# Altium PCB Buck converter.PcbDoc (part 1 of 2)
Units mm, origin at the board's own origin, x right, y up, seen from the top; angles counter-clockwise.
Board outline 40 x 50 mm, 2 copper layers (Top Layer, Bottom Layer); 24 components, 14 nets, 77 pads, 274 vias.
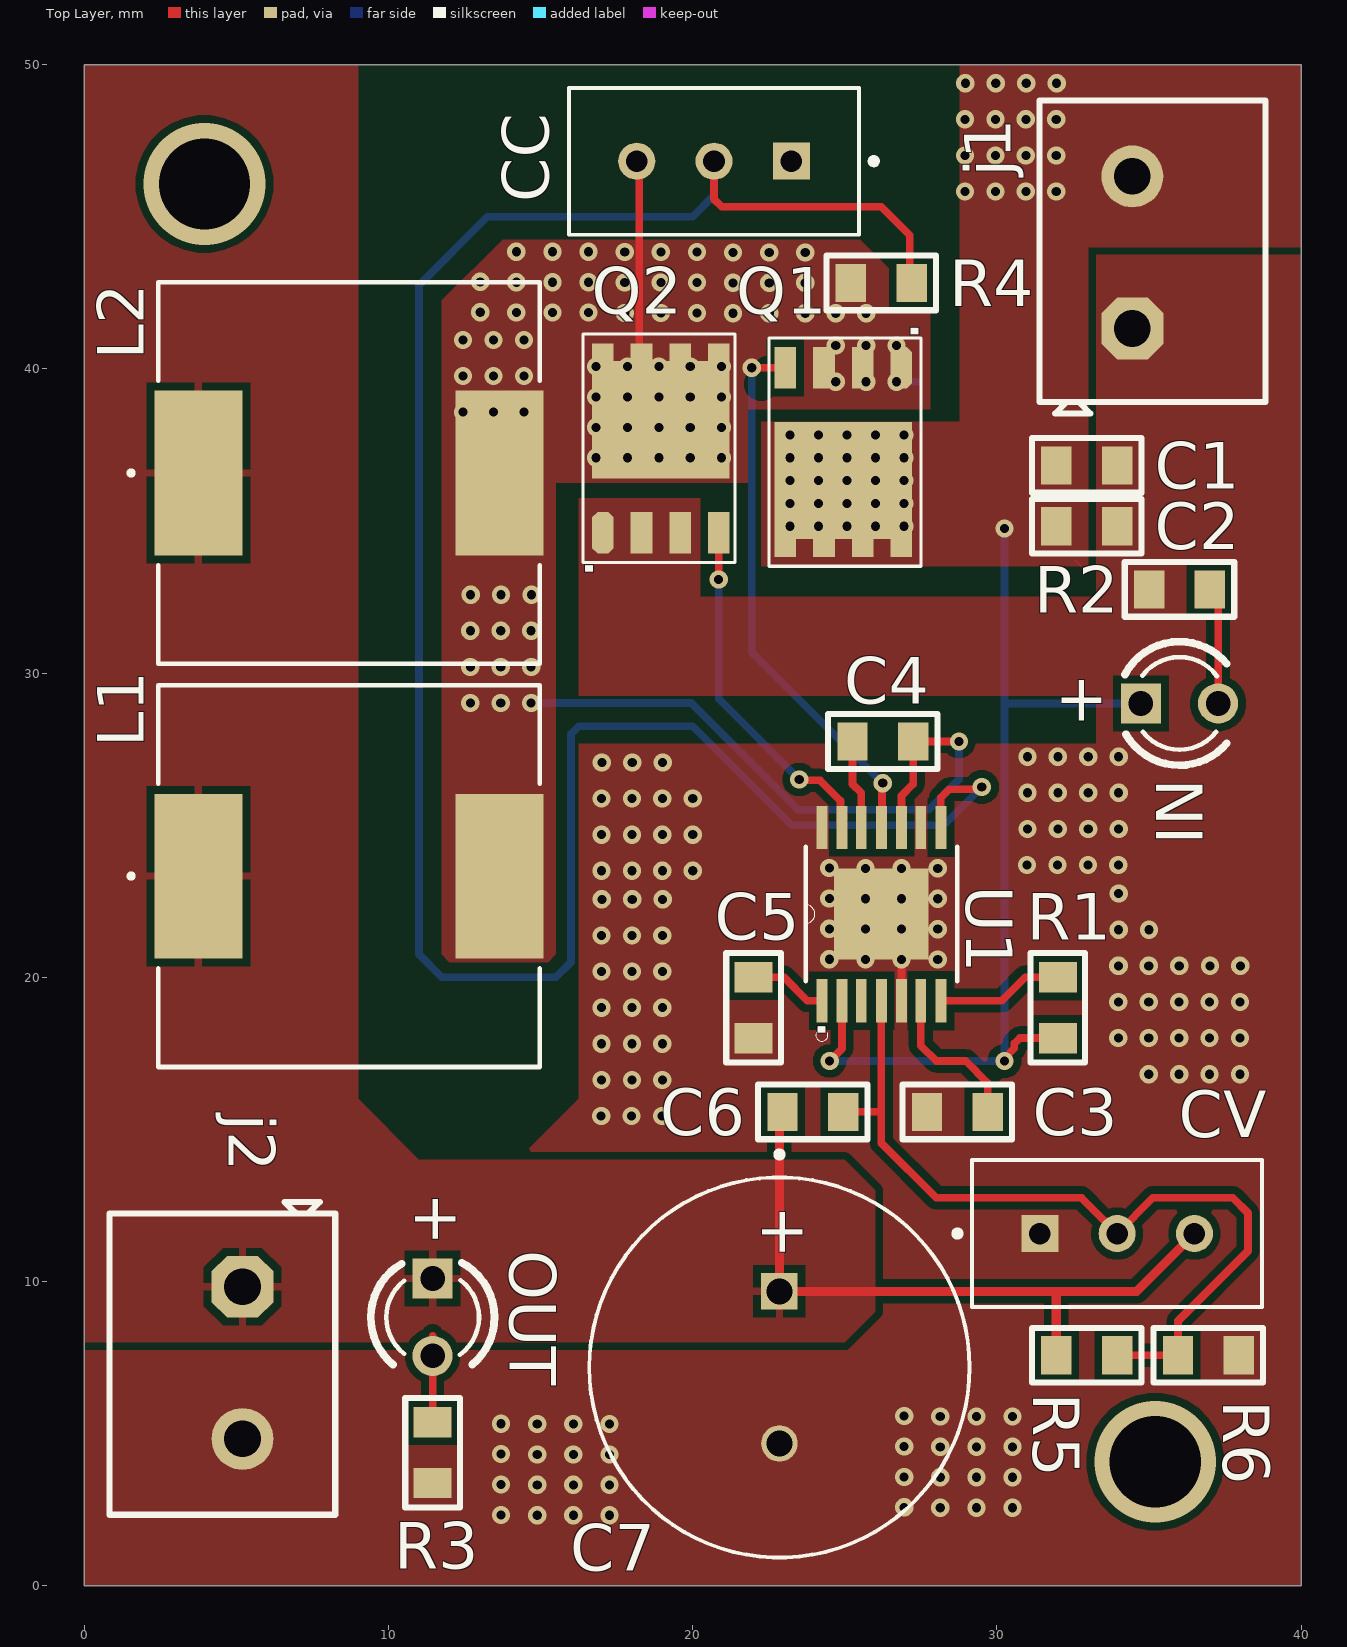
[diagram p0: Top Layer view]
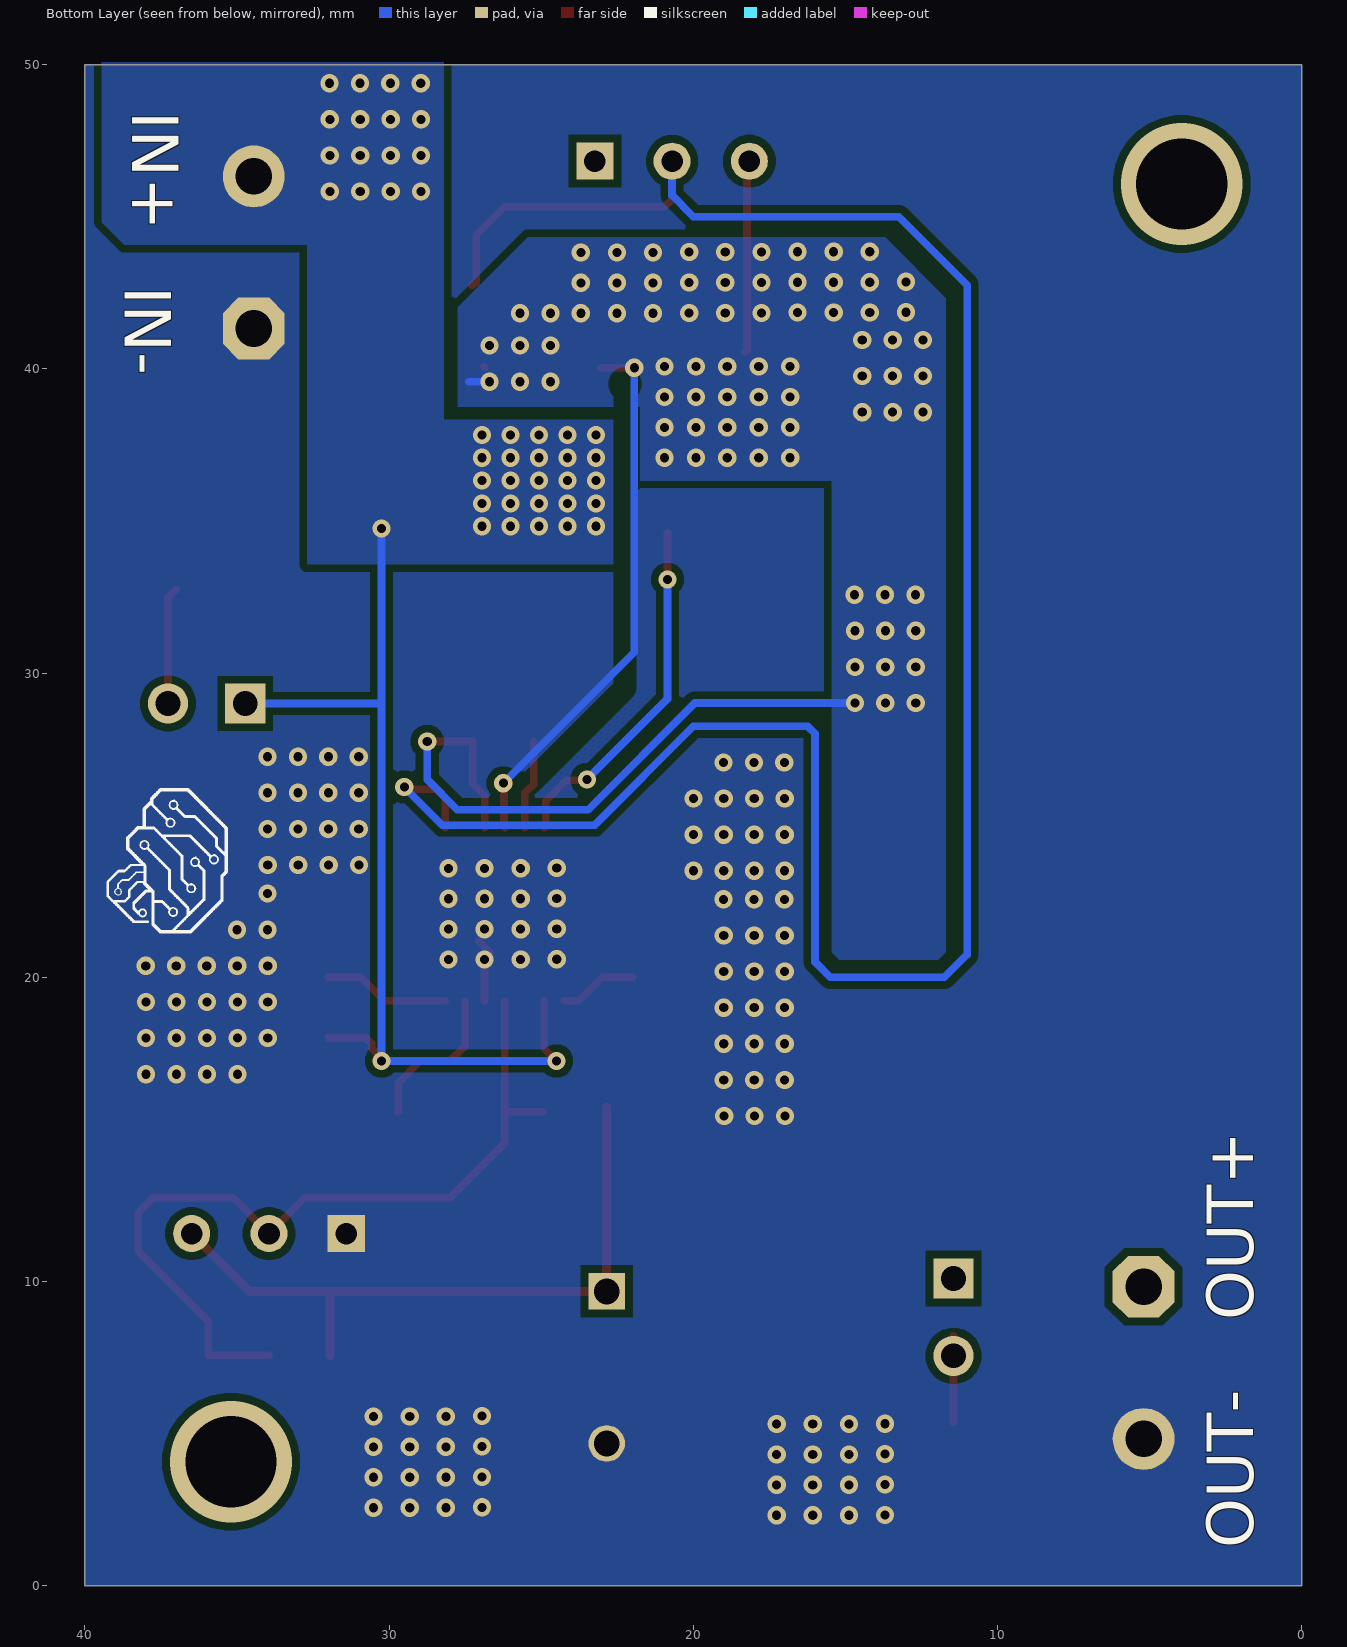
[diagram p1: Bottom Layer view, seen from below]
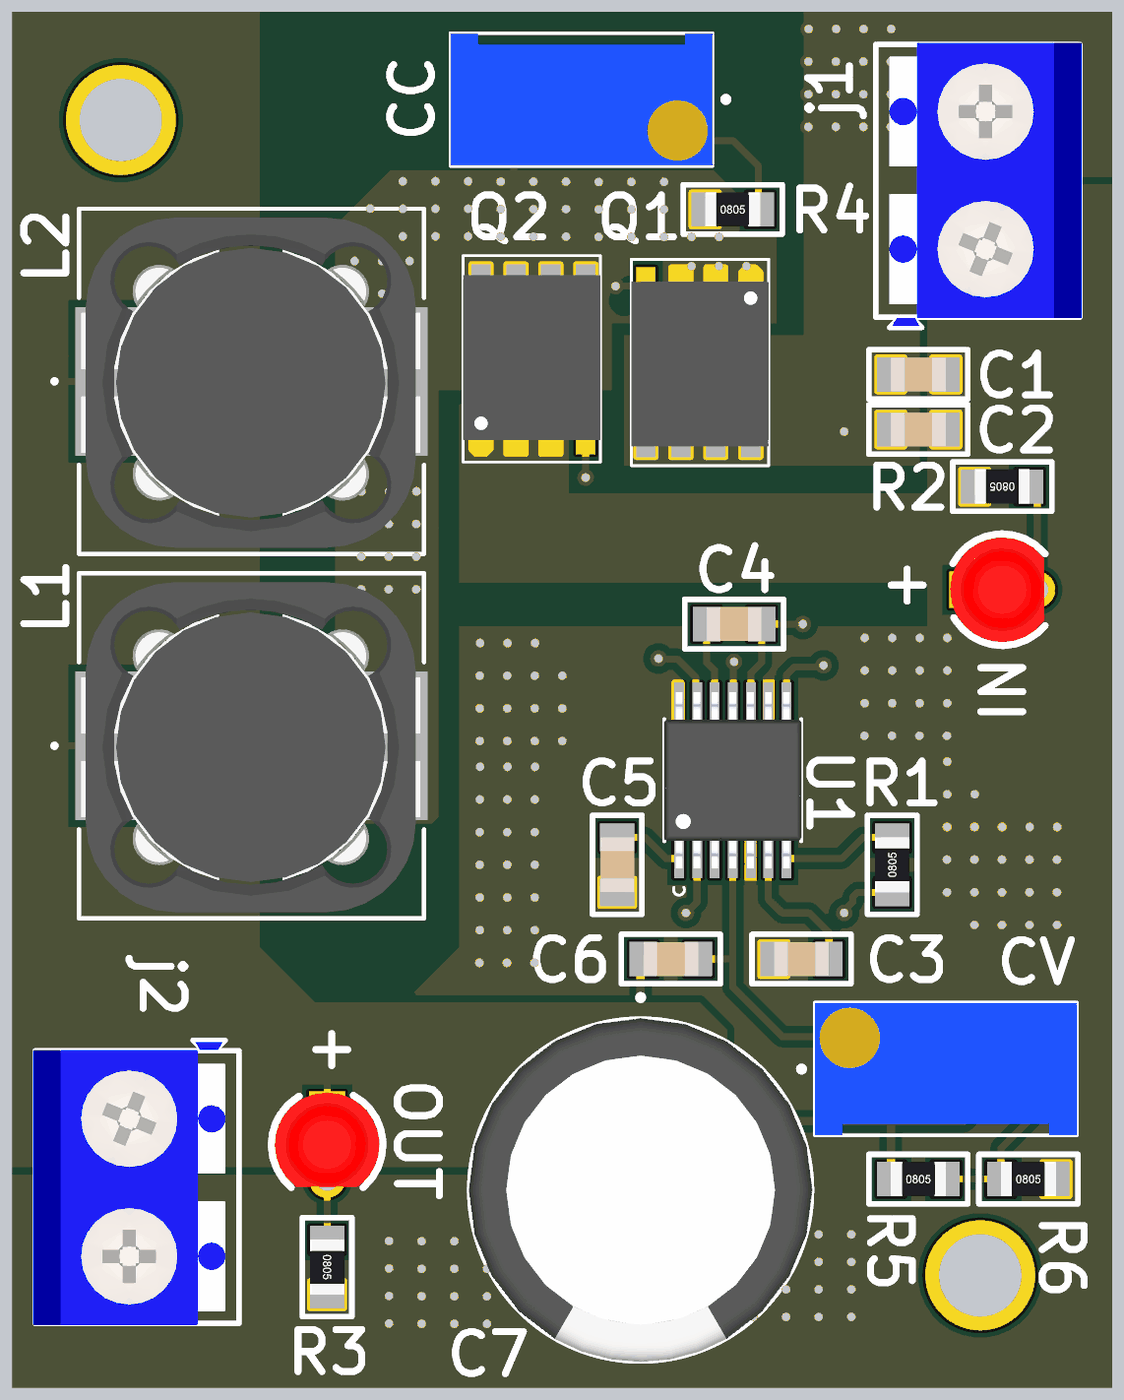
[diagram p2: 3D render of the assembled board from above, using the file's embedded part models]

## Layer stack, top to bottom
Top Solder: solder mask 0.0102, Solder Resist, Dk 3.5
Top Layer: signal copper 0.0356
Dielectric 1: dielectric 0.32, FR-4, Dk 4.8
Bottom Layer: signal copper 0.0356
Bottom Solder: solder mask 0.0102, Solder Resist, Dk 3.5

## Board outline
0,0 40,0 40,50 0,50

## Design rules (kind name [scope] priority, off if disabled: settings)
Clearance [All] p1: gap=0.254 ignorepadtopadclearanceinfootprint=FALSE
HoleSize [All] p1: absolutevalues=TRUE maxlimit=4 minlimit=0.254 maxpercent=80.000 minpercent=20.000
PolygonConnect thermalpad [(InNet('GND') OR InNet('NetC4_1') OR InNet('Vin'))] p1: connectstyle=Direct reliefconductorwidth=0.254 reliefentries=4 polygonreliefangle="90 Angle" airgapwidth=0.254
PolygonConnect [All] p2: connectstyle=Relief reliefconductorwidth=0.254 reliefentries=4 polygonreliefangle="90 Angle" airgapwidth=0.254
RoutingVias [All] p1: holewidth=0.6 width=1 viastyle="Through Hole" minholewidth=0.254 minwidth=0.5 maxholewidth=4 maxwidth=5
SolderMaskExpansion [All] p1: expansion=0.102 istentingtop=FALSE
UnRoutedNet [All] p1: checkbadconnections=TRUE
Width [All] p1: maxlimit=3 minlimit=0.254 preferedwidth=0.254 minimp=50.000000 maximp=50.000000 favimp=50.000000
28 further rules are at their usual default settings.

## Components (designator, comment, footprint, x,y, rotation, side; value= is the part's Value field where it differs from the comment)
C1 "10 uF" "SMD Cap 805" 32.95,36.825 r180 top
C2 "100 nF" "SMD Cap 805" 32.95,34.825 r180 top
C3 "10nF" "SMD Cap 805" 28.7,15.575 r0 top
C4 "470nF" "SMD Cap 805" 26.25,27.75 r180 top
C5 "2.2uF" "SMD Cap 805" 22,19 r90 top
C6 "100pf" "SMD Cap 805" 23.95,15.575 r180 top
C7 "1000uF 50V" "CAP ELECTROLYTE 1000UF 50V" 22.85,7.175 r270 top
CC "TrimPot 3296" "TrimPOT 3296W" 20.7,46.825 r180 top (schematic designator "VR CC")
CV "TrimPot 3296" "TrimPOT 3296W" 33.95,11.575 r0 top (schematic designator "VR CV")
IN "LED" LED3MM 36,29 r0 top (schematic designator LED1)
j1 "screw terminal 1x2" "screw terminal 1x2" 34.45,41.325 r180 top
j2 "screw terminal 1x2" "screw terminal 1x2" 5.2,9.825 r0 top
L1 "6.8uH" "Inductor DR127" 8.7,23.325 r0 top
L2 "6.8uH" "Inductor DR127" 8.7,36.575 r0 top
OUT "LED" LED3MM 11.45,8.825 r270 top (schematic designator LED2)
Q1 "CSD18540Q5B" "VSON-CLIP-8 - V2" 26.835,40.035 r270 top
Q2 "CSD18540Q5B" "VSON-CLIP-8 - V2" 17.065,34.615 r90 top
R1 "82.5 kOhms" "SMD Resistor 805" 32,19 r270 top
R2 "1kohm" "SMD Resistor 805" 36,32.75 r0 top
R3 "1kohm" "SMD Resistor 805" 11.45,4.375 r90 top
R4 "NC" "SMD Resistor 805" 26.2,42.825 r180 top
R5 "NC" "SMD Resistor 805" 32.95,7.575 r180 top
R6 "NC" "SMD Resistor 805" 36.95,7.575 r180 top
U1 "LM3150" "HTSSOP (14)" 28.727,19.842 r90 top

## Footprints (in the part's own frame and the unit in brackets; to place one, negate y for a bottom-side part, rotate by r counter-clockwise, add the part's x,y. Pads: shape width x height; smd on the part's side, far side on the other; paste and mask are expansions set on the pad)
"CAP ELECTROLYTE 1000UF 50V" [mm]
  round 1.2 hole 0.85: N(2.5,0)
  rect 1.2x1.2 hole 0.85: P(-2.5,0)
  silkscreen extent -7.1,-6.25 6.25,6.25, body extent -6.25,-6.25 6.25,6.25, height 25
"HTSSOP (14)" [mil]
  rect 56x14 smd: 1(-24.09,176.49) 2(-24.09,150.49) 3(-24.09,125.49) 4(-24.09,99.49) 5(-24.09,73.49) 6(-24.09,48.49) 7(-24.09,22.49) 8(199.91,22.49) 9(199.91,48.49) 10(199.91,73.49) 11(199.91,99.49) 12(199.91,125.49) 13(199.91,150.49) 14(199.91,176.49)
  rect 118x122 smd: 15(87.91,99.49)
  silkscreen extent -77,1 175,197, body extent -38,1 214,198, height 43
"Inductor DR127" [mil]
  rect 114x213 smd paste+0 mask+0: 1(-195,0) 2(195,0)
  silkscreen extent -285,-247 247,247, body extent -244,-238 242,234, height 295
LED3MM [mil]
  rect 52x52 hole 32: A(-50,0)
  round 52 hole 32: C(50,0)
  silkscreen extent -71,-80 61,80, body extent -75,-75 60,75, height 222
"screw terminal 1x2" [mil]
  oct 80x80 hole 47.24: 1(0,0)
  round 80 hole 47.24: 2(0,-196.85)
  silkscreen extent -172,-295 120,110, body extent -175,-298 124,108, height 399
"SMD Cap 805" [mm]
  rect 1x1.25 smd: 1(-1,0) 2(1,0)
  silkscreen extent -1.8,-0.9 1.8,0.9, body extent -1,-0.62 1,0.63, height 0.6
"SMD Resistor 805" [mm]
  rect 1x1.25 smd: 1(-1,0) 2(1,0)
  silkscreen extent -1.8,-0.9 1.8,0.9, body extent -1,-0.62 1,0.62, height 0.6
"TrimPOT 3296W" [mm]
  rect 1.218x1.218 hole 0.71: 1(-2.54,0)
  round 1.218 hole 0.71: 2(0,0) 3(2.54,0)
  silkscreen extent -5.35,-2.41 4.77,2.42, body extent -4.76,-2.4 4.77,2.4, height 11.55
"VSON-CLIP-8 - V2" [mm]
  oct 1.372x0.71 smd paste-2: 1(-0.001,0.02)
  rect 1.372x0.71 smd paste-2: 2(-0.001,-1.25) 3(-0.001,-2.52) 4(-0.001,-3.79)
  rect 3.85x4.52 smd: 5(3.71,-1.885)
  rect 0.59x0.71 smd: 5(5.925,-1.25) 5(5.925,0.02) 5(5.925,-3.79) 5(5.925,-2.52)
  silkscreen extent -0.97,-4.33 6.52,0.68, body extent -0.17,-4.33 5.82,0.67, height 1.05

## Part data
C1: library part "Cap SMD", "0805 10 uF 50 V ±20% Tolerance X5R Multilayer Ceramic Capacitor", Capacitance=10uF, Case Code (Imperial)=0805, Case Code (Metric)=2012, Dielectric=X5R, Manufacturer=Murata, Manufacturer Part Number=GRM21BR6YA106ME43L, Max Operating Temperature=85°C, Min Operating Temperature=-55°C, Package Quantity=3000, Supplier Part Number 1=490-10515-1-ND, Tolerance=20%, Voltage Rating=35V, Case/Package=0805, Category="Ceramic Capacitors", ComponentLink1Description=http://www.mouser.com/ds/2/281/c02e-2905.pdf?src-supplier=Mouser, ComponentLink1URL=http://www.mouser.com/ds/2/281/c02e-2905.pdf?src-supplier=Mouser, ComponentLink2Description=http://search.murata.co.jp/Ceramy/image/img/A01X/G101/ENG/GRM21BR6YA106ME43-01.pdf?src-supplier=Digi-Key, ComponentLink2URL=http://search.murata.co.jp/Ceramy/image/img/A01X/G101/ENG/GRM21BR6YA106ME43-01.pdf?src-supplier=Digi-Key, Height=1.25mm, Length=0.079inch, Mount="Surface Mount", Packaging="Tape and Reel", Pricing 1="1=0.43000, 10=0.30200, 50=0.21140, 100=0.18110, 500=0.13584, 1000=0.11471 (USD)", RoHS=Yes, RoHS Compliant=Yes, Stock 1=33589, Supplier 1=Digi-Key, Termination=SMD/SMT, Thickness=0.057inch, Voltage Rating (DC)=35V, Weight=0.000335oz, Width=0.049inch
C2: library part "Cap SMD", "CAP CERAMIC, 0.1UF, 10%, 50V, X7R, 0805; Product Range:(Not Available); Capacitance:0.1µF; Capacitance Tolerance:± 10%; Dielectric Characteristic:X7R; Voltage Rating:50V; Capacitor Case Style:0805 [2012 Metric]; Packaging:Full Reel ;RoHS Compliant: Yes", Capacitance=100nF, Case Code (Imperial)=0805, Case Code (Metric)=2012, Dielectric=X7R, Dielectric Material=Ceramic, Insulation Resistance=100GR, Manufacturer="Kyocera AVX", Manufacturer Part Number=08055C104KAT2A, Max Operating Temperature=125°C, Min Operating Temperature=-55°C, Package Quantity=4000, Supplier Part Number 1=478-1395-1-ND, Tolerance=10%, Voltage=50V, Case/Package=0805, Category="Ceramic Capacitors", ComponentLink1Description=https://datasheet.ciiva.com/19475/2009691-19475858.pdf?src-supplier=Jameco, ComponentLink1URL=https://datasheet.ciiva.com/19475/2009691-19475858.pdf?src-supplier=Jameco, ComponentLink2Description=https://datasheet.ciiva.com/11786/0900766b802d4698-11786116.pdf?src-supplier=RSComponents, ComponentLink2URL=https://datasheet.ciiva.com/11786/0900766b802d4698-11786116.pdf?src-supplier=RSComponents, ComponentLink3Description=https://datasheet.ciiva.com/150/cx7r-150257.pdf?src-supplier=Digi-Key, ComponentLink3URL=https://datasheet.ciiva.com/150/cx7r-150257.pdf?src-supplier=Digi-Key, ComponentLink4Description=https://datasheet.ciiva.com/150/cx7r-150258.pdf?src-supplier=Digi-Key, ComponentLink4URL=https://datasheet.ciiva.com/150/cx7r-150258.pdf?src-supplier=Digi-Key, ComponentLink5Description=https://datasheet.ciiva.com/150/cx7r-150259.pdf?src-supplier=Digi-Key, ComponentLink5URL=https://datasheet.ciiva.com/150/cx7r-150259.pdf?src-supplier=Digi-Key, ComponentLink6Description=https://datasheet.ciiva.com/16199/cx7r-16199014.pdf?src-supplier=Future+Electronics, ComponentLink6URL=https://datasheet.ciiva.com/16199/cx7r-16199014.pdf?src-supplier=Future+Electronics, ComponentLink7Description=https://datasheet.ciiva.com/16536/cx7r-16536873.pdf?src-supplier=Avnet+Asia, ComponentLink7URL=https://datasheet.ciiva.com/16536/cx7r-16536873.pdf?src-supplier=Avnet+Asia, ComponentLink8Description=https://datasheet.ciiva.com/16536/cx7r-16536875.pdf?src-supplier=Avnet+Asia, ComponentLink8URL=https://datasheet.ciiva.com/16536/cx7r-16536875.pdf?src-supplier=Avnet+Asia, ComponentLink9Description=https://datasheet.ciiva.com/11504/cx7r-11504044.pdf?src-supplier=Avnet, ComponentLink9URL=https://datasheet.ciiva.com/11504/cx7r-11504044.pdf?src-supplier=Avnet, ComponentLink10Description=https://datasheet.ciiva.com/2988/cx7r-2988014.pdf?src-supplier=Avnet, ComponentLink10URL=https://datasheet.ciiva.com/2988/cx7r-2988014.pdf?src-supplier=Avnet, ComponentLink11Description=https://datasheet.ciiva.com/5416/cx7r-5416959.pdf?src-supplier=Mouser, ComponentLink11URL=https://datasheet.ciiva.com/5416/cx7r-5416959.pdf?src-supplier=Mouser, ComponentLink12Description=https://datasheet.ciiva.com/7812/cx7r-7812079.pdf?src-supplier=Element14, ComponentLink12URL=https://datasheet.ciiva.com/7812/cx7r-7812079.pdf?src-supplier=Element14, Depth=1.25mm, Dissipation Factor=2.5%, Height=0.5mm, Lead Free="Lead Free", Length=2mm, Mount="Surface Mount,PCB", Number of Pins=2, Packaging="Cut Tape", Pricing 1="1=0.10000, 10=0.07600, 50=0.04140, 100=0.03380, 500=0.02416, 1000=0.01898 (USD)", Radiation Hardening=No, REACH SVHC="No SVHC", RoHS=Yes, RoHS Compliant=Yes, Series="MLCC X7R", Stock 1=6160485, Supplier 1=Digi-Key, Termination=Standard, Thickness=0.037inch, Voltage Rating=50V, Voltage Rating (DC)=50V, Weight=0.001411oz, Width=1.2mm
C3: library part "Cap SMD", "Capacitor 10 nF 50 VDC PU=4000 ST, C0805C103K5RACTU, KEMET", Case Code (Imperial)=0805, Case Code (Metric)=2012, Dielectric=X7R, Dielectric Material=Ceramic, Manufacturer=KEMET, Manufacturer Part Number=C0805C103K5RAC-TU, Max Operating Temperature=125°C, Min Operating Temperature=-55°C, Package Quantity=4000, Supplier Part Number 1=399-1158-1-ND, Tolerance=10%, Voltage=50V, Capacitance=10nF, Case/Package=0805, Category="Ceramic Capacitors", ComponentLink1Description=https://datasheet.ciiva.com/7172/1828800-7172412.pdf?src-supplier=Newark, ComponentLink1URL=https://datasheet.ciiva.com/7172/1828800-7172412.pdf?src-supplier=Newark, ComponentLink2Description=https://datasheet.ciiva.com/5904/kem-c1002-x7r-smd-5904709.pdf?src-supplier=Farnell, ComponentLink2URL=https://datasheet.ciiva.com/5904/kem-c1002-x7r-smd-5904709.pdf?src-supplier=Farnell, ComponentLink3Description=https://datasheet.ciiva.com/7842/kem-c1002-x7r-smd-7842533.pdf?src-supplier=Element14, ComponentLink3URL=https://datasheet.ciiva.com/7842/kem-c1002-x7r-smd-7842533.pdf?src-supplier=Element14, ComponentLink4Description=https://datasheet.ciiva.com/28672/1851736-28672830.pdf?src-supplier=Element14, ComponentLink4URL=https://datasheet.ciiva.com/28672/1851736-28672830.pdf?src-supplier=Element14, ComponentLink5Description=https://datasheet.ciiva.com/26923/getdatasheetpartid-759674-26923957.pdf?src-supplier=Verical, ComponentLink5URL=https://datasheet.ciiva.com/26923/getdatasheetpartid-759674-26923957.pdf?src-supplier=Verical, ComponentLink6Description=https://datasheet.ciiva.com/39122/docfinderpartnumberc0402c102k5ractu-39122923.pdf?src-supplier=Onlinecomponents.com, ComponentLink6URL=https://datasheet.ciiva.com/39122/docfinderpartnumberc0402c102k5ractu-39122923.pdf?src-supplier=Onlinecomponents.com, Construction=Flat, Depth=1.25mm, Height=0.78mm, Lead Pitch=0.75mm, Length=2mm, Mount="PCB,Surface Mount", Number of Pins=2, Packaging="Tape and Reel", Pricing 1="1=0.120000, 10=0.087000, 50=0.049400, 100=0.040900, 500=0.028660, 1000=0.023720 (USD)", Radiation Hardening=No, REACH SVHC="No SVHC", RoHS=Yes, Series=C0805C, Stock 1=1963242, Supplier 1=Digi-Key, Termination=SMD/SMT, Thickness=0.035inch, Voltage Rating=50V, Voltage Rating (DC)=50V, Width=1.2mm
C4: library part "Cap SMD", "TAIYO YUDEN - GMK212BJ474KG-T - SMD Multilayer Ceramic Capacitor, 0.47 µF, 35 V, 0805 [2012 Metric], ± 10%, X5R, M Series", Case Code (Imperial)=0805, Case Code (Metric)=2012, Dielectric=X5R, Manufacturer="Taiyo Yuden", Manufacturer Part Number=GMK212BJ474KG-T, Max Operating Temperature=85°C, Min Operating Temperature=-55°C, Package Quantity=1, Supplier Part Number 1=587-1289-1-ND, Tolerance=10%, Voltage Rating=35V, Capacitance=470nF, Case/Package=0805, Category="Ceramic Capacitors", ComponentLink1Description=https://datasheet.ciiva.com/7975/1497285-7975673.pdf?src-supplier=Element14, ComponentLink1URL=https://datasheet.ciiva.com/7975/1497285-7975673.pdf?src-supplier=Element14, ComponentLink2Description=https://datasheet.ciiva.com/135/mlcc-all-e-135179.pdf?src-supplier=Digi-Key, ComponentLink2URL=https://datasheet.ciiva.com/135/mlcc-all-e-135179.pdf?src-supplier=Digi-Key, ComponentLink3Description=https://datasheet.ciiva.com/135/mlcc-all-e-135178.pdf?src-supplier=Digi-Key, ComponentLink3URL=https://datasheet.ciiva.com/135/mlcc-all-e-135178.pdf?src-supplier=Digi-Key, ComponentLink4Description=https://datasheet.ciiva.com/135/mlcc-all-e-135180.pdf?src-supplier=Digi-Key, ComponentLink4URL=https://datasheet.ciiva.com/135/mlcc-all-e-135180.pdf?src-supplier=Digi-Key, ComponentLink5Description=https://datasheet.ciiva.com/5442/mlcc01-e-5442106.pdf?src-supplier=Mouser, ComponentLink5URL=https://datasheet.ciiva.com/5442/mlcc01-e-5442106.pdf?src-supplier=Mouser, ComponentLink6Description=https://datasheet.ciiva.com/11596/mlcc-all-e-11596278.pdf?src-supplier=Avnet, ComponentLink6URL=https://datasheet.ciiva.com/11596/mlcc-all-e-11596278.pdf?src-supplier=Avnet, ComponentLink7Description=https://datasheet.ciiva.com/15920/emultilayer-ceramic-capacitor-15920684.pdf?src-supplier=Onlinecomponents.com, ComponentLink7URL=https://datasheet.ciiva.com/15920/emultilayer-ceramic-capacitor-15920684.pdf?src-supplier=Onlinecomponents.com, ComponentLink8Description=https://datasheet.ciiva.com/30070/emultilayer-ceramic-capacitor-30070951.pdf?src-supplier=Onlinecomponents.com, ComponentLink8URL=https://datasheet.ciiva.com/30070/emultilayer-ceramic-capacitor-30070951.pdf?src-supplier=Onlinecomponents.com, Construction=Flat, Depth=1.25mm, Height=1.25mm, Lead Free="Lead Free", Length=0.079inch, Mount="Surface Mount", Number of Pins=2, Packaging="Tape and Reel", Pricing 1="1=0.19000, 10=0.12900, 50=0.07760, 100=0.06560, 500=0.04484, 1000=0.03968 (USD)", Radiation Hardening=No, REACH SVHC="No SVHC", RoHS=Yes, RoHS Compliant=Yes, Series=M, Stock 1=29722, Supplier 1=Digi-Key, Termination=SMD/SMT, Thickness=0.053inch, Voltage Rating (DC)=35V, Width=0.049inch
C5: library part "Cap SMD", "CAP CER 2.2UF 35V X6S 0805", Case Code (Imperial)=0805, Case Code (Metric)=2012, Dielectric=X6S, Dielectric Material=Ceramic, Manufacturer=TDK, Manufacturer Part Number=C2012X6S1V225K125AB, Max Operating Temperature=105°C, Min Operating Temperature=-55°C, Package Quantity=2000, Supplier Part Number 1=445-14518-1-ND, Tolerance=10%, Voltage Rating=35V, Capacitance=2.2uF, Case/Package=0805, Category="Ceramic Capacitors", ComponentLink1Description=http://www.mouser.com/ds/2/400/tdk_mlcc_commercial_general_en-542463.pdf?src-supplier=Mouser, ComponentLink1URL=http://www.mouser.com/ds/2/400/tdk_mlcc_commercial_general_en-542463.pdf?src-supplier=Mouser, ComponentLink2Description=https://product.tdk.com/en/products/common/pdf/mlcc_partnumber_description.pdf?src-supplier=Digi-Key, ComponentLink2URL=https://product.tdk.com/en/products/common/pdf/mlcc_partnumber_description.pdf?src-supplier=Digi-Key, ComponentLink3Description=http://product.tdk.com/en/catalog/datasheets/mlcc_commercial_general_en.pdf?src-supplier=Avnet, ComponentLink3URL=http://product.tdk.com/en/catalog/datasheets/mlcc_commercial_general_en.pdf?src-supplier=Avnet, Height=1.25mm, Lead Free="Lead Free", Length=0.079inch, Mount="Surface Mount", Packaging="Tape and Reel", Pricing 1="1=0.45000, 10=0.31600, 50=0.23880, 100=0.20790, 500=0.15400, 1000=0.13090 (USD)", RoHS=Yes, RoHS Compliant=Yes, Series=C, Stock 1=4330, Supplier 1=Digi-Key, Termination=SMD/SMT, Thickness=0.057inch, Voltage Rating (DC)=35V, Weight=0.000194oz, Width=0.049inch
C6: library part "Cap SMD", "KEMET - C0805C101J1GACTU - SMD Multilayer Ceramic Capacitor, 100 pF, 100 V, 0805 [2012 Metric], ± 5%, C0G / NP0", Capacitance=100pF, Case Code (Imperial)=0805, Case Code (Metric)=2012, Dielectric=C0G, Dielectric Material=Ceramic, Manufacturer=KEMET, Manufacturer Part Number=C0805C101J1GACTU, Max Operating Temperature=125°C, Min Operating Temperature=-55°C, Package Quantity=1, Supplier Part Number 1=80-C0805C101J1G, Temperature Coefficient=30ppm/°C, Tolerance=5%, Voltage=100V, Case/Package=0805, Category="Ceramic Capacitors", ComponentLink1Description=https://datasheet.ciiva.com/144/docfinderpartnumber-c0805c101j1gactu-144890.pdf?src-supplier=Digi-Key, ComponentLink1URL=https://datasheet.ciiva.com/144/docfinderpartnumber-c0805c101j1gactu-144890.pdf?src-supplier=Digi-Key, ComponentLink2Description=https://datasheet.ciiva.com/18193/getdatasheetpartid-93983-18193285.pdf?src-supplier=Verical, ComponentLink2URL=https://datasheet.ciiva.com/18193/getdatasheetpartid-93983-18193285.pdf?src-supplier=Verical, ComponentLink3Description=https://datasheet.ciiva.com/6126/f9080b-0402-series-c0g-6126695.pdf?src-supplier=Farnell, ComponentLink3URL=https://datasheet.ciiva.com/6126/f9080b-0402-series-c0g-6126695.pdf?src-supplier=Farnell, ComponentLink4Description=https://datasheet.ciiva.com/28688/1789732-28688663.pdf?src-supplier=Element14, ComponentLink4URL=https://datasheet.ciiva.com/28688/1789732-28688663.pdf?src-supplier=Element14, ComponentLink5Description=https://datasheet.ciiva.com/7405/1372242-7405224.pdf?src-supplier=Newark, ComponentLink5URL=https://datasheet.ciiva.com/7405/1372242-7405224.pdf?src-supplier=Newark, ComponentLink6Description=https://datasheet.ciiva.com/14591/70095383-14591851.pdf?src-supplier=Allied+Electronics, ComponentLink6URL=https://datasheet.ciiva.com/14591/70095383-14591851.pdf?src-supplier=Allied+Electronics, ComponentLink7Description=https://datasheet.ciiva.com/14589/70095383-14589484.pdf?src-supplier=Allied+Electronics, ComponentLink7URL=https://datasheet.ciiva.com/14589/70095383-14589484.pdf?src-supplier=Allied+Electronics, ComponentLink8Description=https://datasheet.ciiva.com/2988/kem-c1003-c0g-smd-2988557.pdf?src-supplier=Avnet, ComponentLink8URL=https://datasheet.ciiva.com/2988/kem-c1003-c0g-smd-2988557.pdf?src-supplier=Avnet, ComponentLink9Description=https://datasheet.ciiva.com/2988/kem-c1003-c0g-smd-2988558.pdf?src-supplier=Avnet, ComponentLink9URL=https://datasheet.ciiva.com/2988/kem-c1003-c0g-smd-2988558.pdf?src-supplier=Avnet, ComponentLink10Description=https://datasheet.ciiva.com/7842/40889-7842143.pdf?src-supplier=Element14, ComponentLink10URL=https://datasheet.ciiva.com/7842/40889-7842143.pdf?src-supplier=Element14, Construction=Flat, Contact Material=Tin, Contact Plating=Tin,Matte, Depth=1.25mm, Dissipation Factor=0.1%, Height=0.78mm, Lead Free="Lead Free", Lead Pitch=0.75mm, Length=2mm, Mount="Surface Mount,PCB", Number of Pins=2, Packaging="Tape and Reel", Pricing 1="1=0.12000, 10=0.04700, 50=0.04700, 100=0.03400, 1000=0.02200, 10000=0.01700 (USD)", Radiation Hardening=No, REACH SVHC="No SVHC", RoHS=Yes, RoHS Compliant=Yes, Series=C, Stock 1=7620, Supplier 1=Mouser, Termination=SMD/SMT, Thickness=0.035inch, Voltage Rating=100V, Voltage Rating (DC)=100V, Width=1.2mm
C7: library part "Cap electrolyte", "CAP ALUM 1000UF 20% 50V RADIAL", Capacitance=1uF, Case/Package=Radial, Dielectric Material=Aluminium, Leakage Current=1.5mA, Manufacturer="United Chemi-Con", Manufacturer Part Number=EKMG500ETC1R0ME11D, Max Operating Temperature=105°C, Min Operating Temperature=-55°C, Package Quantity=2000, Ripple Current=13mA, Supplier Part Number 1=661-EKMG500C1R0ME11D, Tolerance=20%, Voltage=50V, Category="Aluminum Electrolytic Capacitors", ComponentLink1Description=https://datasheet.ciiva.com/15190/getdatasheetpartid-474554-15190838.pdf?src-supplier=Verical, ComponentLink1URL=https://datasheet.ciiva.com/15190/getdatasheetpartid-474554-15190838.pdf?src-supplier=Verical, ComponentLink2Description=https://datasheet.ciiva.com/5333/e-vr-6088-5333431.pdf?src-supplier=Mouser, ComponentLink2URL=https://datasheet.ciiva.com/5333/e-vr-6088-5333431.pdf?src-supplier=Mouser, ComponentLink3Description=https://datasheet.ciiva.com/28592/1909356-28592506.pdf?src-supplier=Element14, ComponentLink3URL=https://datasheet.ciiva.com/28592/1909356-28592506.pdf?src-supplier=Element14, ComponentLink4Description=https://datasheet.ciiva.com/7781/e-vr-7781741.pdf?src-supplier=Element14, ComponentLink4URL=https://datasheet.ciiva.com/7781/e-vr-7781741.pdf?src-supplier=Element14, ComponentLink5Description=https://datasheet.ciiva.com/29547/e-vr-29547646.pdf?src-supplier=Digi-Key, ComponentLink5URL=https://datasheet.ciiva.com/29547/e-vr-29547646.pdf?src-supplier=Digi-Key, ComponentLink6Description=https://datasheet.ciiva.com/16512/e-vr-16512911.pdf?src-supplier=Future+Electronics, ComponentLink6URL=https://datasheet.ciiva.com/16512/e-vr-16512911.pdf?src-supplier=Future+Electronics, ComponentLink7Description=https://datasheet.ciiva.com/29547/e-vr-29547647.pdf?src-supplier=Digi-Key, ComponentLink7URL=https://datasheet.ciiva.com/29547/e-vr-29547647.pdf?src-supplier=Digi-Key, ComponentLink8Description=https://datasheet.ciiva.com/14597/70187464-14597647.pdf?src-supplier=Allied+Electronics, ComponentLink8URL=https://datasheet.ciiva.com/14597/70187464-14597647.pdf?src-supplier=Allied+Electronics, Construction=RADIAL, Contact Plating=Tin, Diameter=12.5mm, Dissipation Factor=0.12%, Height=25mm, Height - Seated (Max)=0.49inch, Lead Diameter=0.5mm, Lead Free="Lead Free", Lead Pitch=5mm, Length=25mm, Life (Hours)=1000Hour, Mount="Through Hole", Number of Pins=2, Packaging="Tape and Reel", Pricing 1="1=0.42000, 10=0.29400, 50=0.29400, 100=0.17600, 500=0.13200, 1000=0.11200, 2000=0.10500, 4000=0.09900, 10000=0.09900 (USD)", Pricing 2="1=1.04000, 10=0.79200, 50=0.65820, 100=0.56680 (USD)", Radiation Hardening=No, REACH SVHC="No SVHC", RoHS=Yes, RoHS Compliant=Yes, Series=KMG, Stock 1=5, Stock 2=7451, Supplier 1=Mouser, Supplier 2=Digi-Key, Supplier Part Number 2=493-12786-1-ND, Termination=Radial, Voltage Rating=50V, Voltage Rating (DC)=50V
CC CV: library part "TrimPot 3296W", "Trimmer Resistors - Through Hole 3/8 1Kohms Sealed Vertical Adjust", Color=Blue, Insulation Resistance=1GR, Manufacturer=Bourns, Manufacturer Part Number=3296W-1-102LF, Max Operating Temperature=125°C, Max Power Dissipation=500mW, Min Operating Temperature=-55°C, Package Quantity=50, Resistance=1kR, Resistor Type=Cermet, Supplier Part Number 1=3296W-102LF-ND, Temperature Coefficient=100ppm/°C, Tolerance=10%, Category="Variable Resistors and Potentiometers", ComponentLink1Description=https://datasheet.ciiva.com/11831/0900766b8069ccf4-11831058.pdf?src-supplier=RSComponents, ComponentLink1URL=https://datasheet.ciiva.com/11831/0900766b8069ccf4-11831058.pdf?src-supplier=RSComponents, ComponentLink2Description=https://datasheet.ciiva.com/26913/3296w-1-102lf-26913883.pdf?src-supplier=IIIC, ComponentLink2URL=https://datasheet.ciiva.com/26913/3296w-1-102lf-26913883.pdf?src-supplier=IIIC, ComponentLink3Description=https://datasheet.ciiva.com/2156/3296-2156898.pdf?src-supplier=Digi-Key, ComponentLink3URL=https://datasheet.ciiva.com/2156/3296-2156898.pdf?src-supplier=Digi-Key, ComponentLink4Description=https://datasheet.ciiva.com/16467/3296-16467957.pdf?src-supplier=Avnet+Asia, ComponentLink4URL=https://datasheet.ciiva.com/16467/3296-16467957.pdf?src-supplier=Avnet+Asia, ComponentLink5Description=https://datasheet.ciiva.com/30155/3296-30155542.pdf?src-supplier=Onlinecomponents.com, ComponentLink5URL=https://datasheet.ciiva.com/30155/3296-30155542.pdf?src-supplier=Onlinecomponents.com, ComponentLink6Description=https://datasheet.ciiva.com/1131/1815117-1131272.pdf?src-supplier=Element14, ComponentLink6URL=https://datasheet.ciiva.com/1131/1815117-1131272.pdf?src-supplier=Element14, ComponentLink7Description=https://datasheet.ciiva.com/3266/3296-3266185.pdf?src-supplier=Avnet, ComponentLink7URL=https://datasheet.ciiva.com/3266/3296-3266185.pdf?src-supplier=Avnet, ComponentLink8Description=https://datasheet.ciiva.com/14173/ew3296-dat-e-14173019.pdf?src-supplier=Distrelec, ComponentLink8URL=https://datasheet.ciiva.com/14173/ew3296-dat-e-14173019.pdf?src-supplier=Distrelec, ComponentLink9Description=https://datasheet.ciiva.com/25907/3296-25907227.pdf?src-supplier=Avnet+Europe, ComponentLink9URL=https://datasheet.ciiva.com/25907/3296-25907227.pdf?src-supplier=Avnet+Europe, ComponentLink10Description=https://datasheet.ciiva.com/18411/70153578-18411564.pdf?src-supplier=Allied+Electronics, ComponentLink10URL=https://datasheet.ciiva.com/18411/70153578-18411564.pdf?src-supplier=Allied+Electronics, ComponentLink11Description=https://datasheet.ciiva.com/20164/68-0300e-20164044.pdf?src-supplier=Rapid+Electronics, ComponentLink11URL=https://datasheet.ciiva.com/20164/68-0300e-20164044.pdf?src-supplier=Rapid+Electronics, Contact Plating=Tin,Matte, Depth=4.83mm, Height=0.395inch, Lead Free="Lead Free", Length=9.53mm, Military Standard=Not, Mount="Through Hole,Panel,PCB", Number of Turns=25, Packaging=Rail/Tube, Power Rating=500mW, Pricing 1="1=2.41000, 10=2.11700, 25=1.89800, 50=1.82500, 100=1.75200, 250=1.67900, 500=1.38700, 1000=1.31400, 5000=1.09500 (USD)", Radiation Hardening=No, REACH SVHC="No SVHC", RoHS=Yes, Supplier 1=Digi-Key, Taper=Linear, Termination=Pin, Weight=0.03oz, Width=9.53mm
IN OUT: "LED 3 mm (T1) red, 151031SS04000, Würth Elektronik", Case/Package=Radial, Color=Red, Forward Current=30mA, Forward Voltage=2V, Manufacturer="Wurth Electronics", Manufacturer Part Number=151031SS04000, Max Operating Temperature=85°C, Min Operating Temperature=-40°C, Package Quantity=1, Supplier Part Number 1=732-5005-ND, Test Current=20mA, Category=LEDs, ComponentLink1Description=https://datasheet.ciiva.com/22657/151031ss06000-22657010.pdf?src-supplier=Element14, ComponentLink1URL=https://datasheet.ciiva.com/22657/151031ss06000-22657010.pdf?src-supplier=Element14, ComponentLink2Description=https://datasheet.ciiva.com/29335/759483-da-01-en-tht-led-3mm-superrot-151031ss06000-29335440.pdf?src-supplier=Conrad, ComponentLink2URL=https://datasheet.ciiva.com/29335/759483-da-01-en-tht-led-3mm-superrot-151031ss06000-29335440.pdf?src-supplier=Conrad, ComponentLink3Description=https://datasheet.ciiva.com/29562/151031ss06000-29562907.pdf?src-supplier=Digi-Key, ComponentLink3URL=https://datasheet.ciiva.com/29562/151031ss06000-29562907.pdf?src-supplier=Digi-Key, ComponentLink4Description=https://datasheet.ciiva.com/22657/151031ss04000-22657008.pdf?src-supplier=Element14, ComponentLink4URL=https://datasheet.ciiva.com/22657/151031ss04000-22657008.pdf?src-supplier=Element14, ComponentLink5Description=https://datasheet.ciiva.com/29335/759482-da-01-en-tht-led-3mm-superrot-151031ss04000-29335443.pdf?src-supplier=Conrad, ComponentLink5URL=https://datasheet.ciiva.com/29335/759482-da-01-en-tht-led-3mm-superrot-151031ss04000-29335443.pdf?src-supplier=Conrad, Dominant Wavelength=635nm, Height=5.55mm, Lens Size=3mm, Lens Style=Diffused,Round,Circular, Luminous Intensity=160mcd, Mount="Through Hole", Packaging=Bulk, Pricing 1="1=0.17000, 50=0.16100, 100=0.13800, 500=0.11900 (USD)", REACH SVHC=Unknown, RoHS=Yes, RoHS Compliant=Yes, Stock 1=354, Supplier 1=Digi-Key, Viewing Angle=40°, Wavelength=635nm
j1 j2: "WURTH ELEKTRONIK - 691214110002 - Wire-To-Board Terminal Block, 3.5 mm, 2 Positions, 24 AWG, 16 AWG, 1.5 mm², Screw", Color=Blue,Green, Current=10A, Manufacturer="Wurth Electronics", Manufacturer Part Number=691214110002, Max Operating Temperature=105°C, Min Operating Temperature=-40°C, Package Quantity=1400, Supplier Part Number 1=732-2747-ND, Voltage=300V, Category="Terminal Blocks", ComponentLink1Description=https://datasheet.ciiva.com/824/6912141100xx-824001.pdf?src-supplier=Digi-Key, ComponentLink1URL=https://datasheet.ciiva.com/824/6912141100xx-824001.pdf?src-supplier=Digi-Key, ComponentLink2Description=https://datasheet.ciiva.com/48693/001088618-da-01-en-wr-tbl-terminal-block2141-691214110002-48693195.pdf?src-supplier=Conrad, ComponentLink2URL=https://datasheet.ciiva.com/48693/001088618-da-01-en-wr-tbl-terminal-block2141-691214110002-48693195.pdf?src-supplier=Conrad, Contact Material=Brass, Contact Plating=Brass,Tin, Current Rating=10A, Height=12.2mm, Housing Material=PA66, Length=7.4mm, Mount="Through Hole", Number of Contacts=2, Number of Levels=1, Number of Positions Per Level=2, Packaging=Bulk, Pitch=0.138inch, Plating=Brass,Steel, Pricing 1="1=0.83000, 10=0.73900, 50=0.63800, 100=0.57100, 500=0.53800, 1400=0.50400 (USD)", REACH SVHC=Unknown, RoHS=Yes, RoHS Compliant=Yes, Series="WR-TBL Series 2141", Stock 1=5949, Stripping Length=-6mm, Supplier 1=Digi-Key, Termination=Screw, Voltage Rating=300V, Width=7.9mm, Wire Gauge (Max)=24AWG, Wire Gauge (Min)=16AWG, Wire/Cable Gauge=24AWG
L1 L2: library part "Inductor CDRH127", "General Purpose Inductor, 6.8uH, 20%, 1 Element, Ferrite-Core, SMD, 4949", Case/Package=Nonstandard, Current Rating=2.95A, DC Resistance (DCR)=71.9mR, Inductance=47uH, Inductance Tolerance=20%, Inductor Type="POWER INDUCTOR", Manufacturer="Eaton Cooper", Manufacturer Part Number=DR127-470-R, Max DC Current=5.28A, Max Operating Temperature=125°C, Min Operating Temperature=-40°C, Package Quantity=600, Resistor Type=Wirewound, Self Resonant Frequency=100kHz, Supplier Part Number 1=513-1050-1-ND, Category="Fixed Inductors", ComponentLink1Description=https://datasheet.ciiva.com/14667/0900766b8116a153-14667792.pdf?src-supplier=RSComponents, ComponentLink1URL=https://datasheet.ciiva.com/14667/0900766b8116a153-14667792.pdf?src-supplier=RSComponents, ComponentLink2Description=https://datasheet.ciiva.com/26858/getdatasheetpartid-251127-26858422.pdf?src-supplier=Verical, ComponentLink2URL=https://datasheet.ciiva.com/26858/getdatasheetpartid-251127-26858422.pdf?src-supplier=Verical, ComponentLink3Description=https://datasheet.ciiva.com/16940/70037876-16940727.pdf?src-supplier=Allied+Electronics, ComponentLink3URL=https://datasheet.ciiva.com/16940/70037876-16940727.pdf?src-supplier=Allied+Electronics, ComponentLink4Description=https://datasheet.ciiva.com/8005/87246-8005180.pdf?src-supplier=Element14, ComponentLink4URL=https://datasheet.ciiva.com/8005/87246-8005180.pdf?src-supplier=Element14, ComponentLink5Description=https://datasheet.ciiva.com/30240/43bus-elx-ds-4315-dr-ser-30240985.pdf?src-supplier=Onlinecomponents.com, ComponentLink5URL=https://datasheet.ciiva.com/30240/43bus-elx-ds-4315-dr-ser-30240985.pdf?src-supplier=Onlinecomponents.com, ComponentLink6Description=https://datasheet.ciiva.com/26858/getdatasheetpartid-249064-26858398.pdf?src-supplier=Verical, ComponentLink6URL=https://datasheet.ciiva.com/26858/getdatasheetpartid-249064-26858398.pdf?src-supplier=Verical, ComponentLink7Description=https://datasheet.ciiva.com/30075/4a32919a-7470-4ae0-be45-b59e3a1351ef-30075147.pdf?src-supplier=Onlinecomponents.com, ComponentLink7URL=https://datasheet.ciiva.com/30075/4a32919a-7470-4ae0-be45-b59e3a1351ef-30075147.pdf?src-supplier=Onlinecomponents.com, Core Material=Ferrite, Depth=12.5mm, Height=8mm, Height - Seated (Max)=0.315inch, Lead Free="Lead Free", Length=12.5mm, Military Standard=Not, Mount="Surface Mount", Number of Pins=2, Packaging="Tape and Reel", Pricing 1="1=1.62000, 10=1.50600, 25=1.39000, 50=1.15840, 100=1.08880 (USD)", Pricing 2="1=1.46000, 10=1.35100, 25=1.24720, 50=1.03960, 100=0.97710, 250=0.87320 (USD)", Radiation Hardening=No, Rated Current-Max=2.95A, REACH SVHC="No SVHC", RMS Current (Irms)=2.95A, RoHS=Yes, RoHS Compliant=Yes, Saturation Current=5.28A, Series=DR, Shielding=Shielded, Stock 1=11925, Stock 2=288, Supplier 1=Digi-Key, Supplier 2=Digi-Key, Supplier Part Number 2=513-1530-1-ND, Termination=SMD/SMT, Test Frequency=100kHz, Tolerance=20%, Weight=0.208oz, Width=0.492inch
Q1 Q2: "N-Channel 60V 100A _Ta_ 3.1W _Ta_, 195W _Tc_ Surface Mount 8-VSON-CLIP _5x6_", Package="VSON-8 Texas Instruments", Digi-Key_Part_Number=296-41076-1-ND, Digi-Key_Purchase_URL=https://www.digikey.cl/product-detail/en/texas-instruments/CSD18540Q5B/296-41076-1-ND/5181337?utm_source=snapeda&utm_medium=aggregator&utm_campaign=symbol, Manufacturer Part Number=CSD18540Q5B, MF="Texas Instruments", SnapEDA_Link=https://www.snapeda.com/parts/CSD18540Q5B/Texas%20Instruments/view-part/272196/?ref=snap
R1: library part "Resistor SMD", "PANASONIC ELECTRONIC COMPONENTS         ERJ6ENF8252V             SMD Chip Resistor, Thick Film, 82.5 kohm, 150 V, 0805 [2012 Metric], 125 mW,  1%, ERJ6E Series", Case Code (Imperial)=0805, Case Code (Metric)=2012, Manufacturer=Panasonic, Manufacturer Part Number=ERJ-6ENF8252V, Max Operating Temperature=155°C, Max Power Dissipation=125mW, Min Operating Temperature=-55°C, Package Quantity=1, Resistance=82.5kR, Resistance Tolerance=1%, Resistor Type="Thick Film", Supplier Part Number 1=P82.5KCCT-ND, Temperature Coefficient=100ppm/°C, Voltage Rating=150V, Case/Package=0805, Category="Chip SMD Resistors", ComponentLink1Description=https://datasheet.ciiva.com/22668/1678782-22668199.pdf?src-supplier=Element14, ComponentLink1URL=https://datasheet.ciiva.com/22668/1678782-22668199.pdf?src-supplier=Element14, ComponentLink2Description=https://datasheet.ciiva.com/22721/1678782-22721339.pdf?src-supplier=Farnell, ComponentLink2URL=https://datasheet.ciiva.com/22721/1678782-22721339.pdf?src-supplier=Farnell, ComponentLink3Description=https://datasheet.ciiva.com/24160/aoa0000ce2-24160139.pdf?src-supplier=Mouser, ComponentLink3URL=https://datasheet.ciiva.com/24160/aoa0000ce2-24160139.pdf?src-supplier=Mouser, ComponentLink4Description=https://datasheet.ciiva.com/16758/70260748-16758493.pdf?src-supplier=Allied+Electronics, ComponentLink4URL=https://datasheet.ciiva.com/16758/70260748-16758493.pdf?src-supplier=Allied+Electronics, ComponentLink5Description=https://datasheet.ciiva.com/30205/aoa0000ce2-30205501.pdf?src-supplier=Onlinecomponents.com, ComponentLink5URL=https://datasheet.ciiva.com/30205/aoa0000ce2-30205501.pdf?src-supplier=Onlinecomponents.com, ComponentLink6Description=https://datasheet.ciiva.com/28548/1694929-28548590.pdf?src-supplier=Element14, ComponentLink6URL=https://datasheet.ciiva.com/28548/1694929-28548590.pdf?src-supplier=Element14, Construction=Rectangular, Contact Plating=Tin, Depth=1.25mm, Features="Automotive AEC-Q200", Height=0.6mm, Lead Free="Lead Free", Length=2mm, Military Standard=Not, Mount="Surface Mount", Number of Terminations=2, Packaging="Tape and Reel", Power Rating=125mW, Pricing 1="1=0.10000, 10=0.07900, 100=0.03030, 1000=0.01333, 2500=0.01152 (USD)", REACH SVHC=Unknown, RoHS=Yes, RoHS Compliant=Yes, Series=ERJ, Stock 1=11905, Supplier 1=Digi-Key, Technology="THICK FILM", Termination=SMD/SMT, Tolerance=1%, Voltage Rating (DC)=150V, Weight=0.000194oz, Width=0.049inch
R2 R3 R6: library part "Resistor SMD", "RESISTOR, 0805 1K 1%, FULL REEL; Product Range:YAGEO - RC Series; Resistance:1kohm; Power Rating:125mW; Resistance Tolerance:± 1%; Resistor Case Style:0805 [2012 Metric]; Resistor Element Material:Thick Film; Temperature Coefficient:± 250ppm/°C; Voltage Rating:150V; Packaging:Tape & Reel; MSL:-; SVHC:No SVHC (16-Dec-2013); External Depth:0.55mm; External Length / Height:2mm; External Width:1.25mm; No. of Pins:2; Operating Temperature Max:155°C; Operating Temperature Min:-55°C; Operating Temperature Range:-55°C to +155°C; Reel Quantity:5000; Resistor Mounting:SMD; Series:RC12H; Temperature Coef", Case Code (Imperial)=0805, Case Code (Metric)=2012, Manufacturer=Yageo, Manufacturer Part Number=RC0805FR-071KL, Max Operating Temperature=155°C, Max Power Dissipation=125mW, Min Operating Temperature=-55°C, Package Quantity=1, Resistance=1kR, Resistance Tolerance=1%, Resistor Type="Thick Film", Supplier Part Number 1=311-1.00KCRCT-ND, Temperature Coefficient=100ppm/°C, Voltage Rating=150V, Case/Package=0805, Category="Chip SMD Resistors", ComponentLink1Description=https://datasheet.ciiva.com/2456/pyu-r-int-thick-7-2456976.pdf?src-supplier=Digi-Key, ComponentLink1URL=https://datasheet.ciiva.com/2456/pyu-r-int-thick-7-2456976.pdf?src-supplier=Digi-Key, ComponentLink2Description=https://datasheet.ciiva.com/2456/pyu-r-int-thick-7-2456977.pdf?src-supplier=Digi-Key, ComponentLink2URL=https://datasheet.ciiva.com/2456/pyu-r-int-thick-7-2456977.pdf?src-supplier=Digi-Key, ComponentLink3Description=https://datasheet.ciiva.com/7941/1686128-7941719.pdf?src-supplier=Element14, ComponentLink3URL=https://datasheet.ciiva.com/7941/1686128-7941719.pdf?src-supplier=Element14, ComponentLink4Description=https://datasheet.ciiva.com/16850/rc0805-16850409.pdf?src-supplier=Future+Electronics, ComponentLink4URL=https://datasheet.ciiva.com/16850/rc0805-16850409.pdf?src-supplier=Future+Electronics, ComponentLink5Description=https://datasheet.ciiva.com/46385/444164-46385020.pdf?src-supplier=Element14, ComponentLink5URL=https://datasheet.ciiva.com/46385/444164-46385020.pdf?src-supplier=Element14, ComponentLink6Description=https://datasheet.ciiva.com/2456/pyu-r-int-thick-7-2456975.pdf?src-supplier=Digi-Key, ComponentLink6URL=https://datasheet.ciiva.com/2456/pyu-r-int-thick-7-2456975.pdf?src-supplier=Digi-Key, Construction=Rectangular, Depth=1.25mm, Features="Moisture Resistant", Height=0.024inch, Lead Free="Lead Free", Length=0.079inch, Military Standard=Not, Number of Pins=2, Number of Terminations=2, Packaging="Tape and Reel", Power Rating=125mW, Pricing 1="1=0.10000, 10=0.04200, 100=0.01690, 1000=0.00759, 2500=0.00659 (USD)", REACH SVHC=Unknown, RoHS=Yes, RoHS Compliant=Yes, Series=RC, Size Code=0805, Stock 1=4598539, Supplier 1=Digi-Key, Termination=SMD/SMT, Tolerance=1%, Voltage Rating (DC)=150V, Width=0.049inch
R4 R5: library part "Resistor SMD", "RESISTOR, 0805 1K 1%, FULL REEL; Product Range:YAGEO - RC Series; Resistance:1kohm; Power Rating:125mW; Resistance Tolerance:± 1%; Resistor Case Style:0805 [2012 Metric]; Resistor Element Material:Thick Film; Temperature Coefficient:± 250ppm/°C; Voltage Rating:150V; Packaging:Tape & Reel; MSL:-; SVHC:No SVHC (16-Dec-2013); External Depth:0.55mm; External Length / Height:2mm; External Width:1.25mm; No. of Pins:2; Operating Temperature Max:155°C; Operating Temperature Min:-55°C; Operating Temperature Range:-55°C to +155°C; Reel Quantity:5000; Resistor Mounting:SMD; Series:RC12H; Temperature Coef", Case Code (Imperial)=0805, Case Code (Metric)=2012, Manufacturer=Yageo, Manufacturer Part Number=RC0805FR-071KL, Max Operating Temperature=155°C, Max Power Dissipation=125mW, Min Operating Temperature=-55°C, Package Quantity=1, Resistance Tolerance=1%, Resistor Type="Thick Film", Supplier Part Number 1=311-1.00KCRCT-ND, Temperature Coefficient=100ppm/°C, Voltage Rating=150V, Case/Package=0805, Category="Chip SMD Resistors", ComponentLink1Description=https://datasheet.ciiva.com/2456/pyu-r-int-thick-7-2456976.pdf?src-supplier=Digi-Key, ComponentLink1URL=https://datasheet.ciiva.com/2456/pyu-r-int-thick-7-2456976.pdf?src-supplier=Digi-Key, ComponentLink2Description=https://datasheet.ciiva.com/2456/pyu-r-int-thick-7-2456977.pdf?src-supplier=Digi-Key, ComponentLink2URL=https://datasheet.ciiva.com/2456/pyu-r-int-thick-7-2456977.pdf?src-supplier=Digi-Key, ComponentLink3Description=https://datasheet.ciiva.com/7941/1686128-7941719.pdf?src-supplier=Element14, ComponentLink3URL=https://datasheet.ciiva.com/7941/1686128-7941719.pdf?src-supplier=Element14, ComponentLink4Description=https://datasheet.ciiva.com/16850/rc0805-16850409.pdf?src-supplier=Future+Electronics, ComponentLink4URL=https://datasheet.ciiva.com/16850/rc0805-16850409.pdf?src-supplier=Future+Electronics, ComponentLink5Description=https://datasheet.ciiva.com/46385/444164-46385020.pdf?src-supplier=Element14, ComponentLink5URL=https://datasheet.ciiva.com/46385/444164-46385020.pdf?src-supplier=Element14, ComponentLink6Description=https://datasheet.ciiva.com/2456/pyu-r-int-thick-7-2456975.pdf?src-supplier=Digi-Key, ComponentLink6URL=https://datasheet.ciiva.com/2456/pyu-r-int-thick-7-2456975.pdf?src-supplier=Digi-Key, Construction=Rectangular, Depth=1.25mm, Features="Moisture Resistant", Height=0.024inch, Lead Free="Lead Free", Length=0.079inch, Military Standard=Not, Number of Pins=2, Number of Terminations=2, Packaging="Tape and Reel", Power Rating=125mW, Pricing 1="1=0.10000, 10=0.04200, 100=0.01690, 1000=0.00759, 2500=0.00659 (USD)", REACH SVHC=Unknown, Resistance=NC, RoHS=Yes, RoHS Compliant=Yes, Series=RC, Size Code=0805, Stock 1=4598539, Supplier 1=Digi-Key, Termination=SMD/SMT, Tolerance=1%, Voltage Rating (DC)=150V, Width=0.049inch
U1: "IC REG CTRLR BUCK 14TSSOP", Case/Package=HTSSOP, Manufacturer="TI National Semiconductor", Manufacturer Part Number=LM3150MHX/NOPB, Max Frequency=1MHz, Max Operating Temperature=125°C, Max Supply Voltage=42V, Min Operating Temperature=-40°C, Min Supply Voltage=6V, Output Current=12A, Output Voltage=600mV, Package Quantity=2500, Quiescent Current=3.5mA, Supplier Part Number 1=296-35276-1-ND, Category="Voltage Regulators - Switching", Contact Plating=Tin,Matte, Duty Cycle=95%, Features=UVLO, Lead Free="Lead Free", Max Duty Cycle=96%, Mount="Surface Mount", Number of Outputs=1, Number of Pins=14, Packaging="Tape and Reel", Pricing 1="1=3.67000, 10=3.29700, 25=3.11720, 100=2.70160, 250=2.56304, 500=2.29980, 1000=2.28725 (USD)", Radiation Hardening=No, REACH SVHC="No SVHC", RoHS=Yes, RoHS Compliant=Yes, Series="PowerWise®, SIMPLE SWITCHER®", Supplier 1=Digi-Key, Switching Frequency=1MHz

## Via types
v1: diameter 0.6, hole 0.3, Top Layer to Bottom Layer, tented both sides, 272 vias
v2: diameter 4, hole 3, Top Layer to Bottom Layer, 2 vias

## Nets (pads, with @x,y where several pads share a name; then routed paths per layer and width w, separated by ;. In a path a pad name is that pad's centre, name@x,y a point inside that pad or via, vN(x,y) a via of type N, cw(c..) or ccw(c..) an arc to the next point about the centre after c; other vN are vias at no path point)
GND: C1.1 C2.1 C3.1 C5.1 C7.N CV.1 j1.1 j2.2 Q2.1 Q2.2 Q2.3 R2.1 R3.1 R6.1 U1.5 U1.9 U1.14 U1.15 | length 1.9
  Top Layer w0.254: U1.15@26.661,20.786 U1.15@27.075,21.2 ; U1.5 26.863,19.233 26.863,20.578 v1(26.866,20.581)
  other v1: 14.887,2.314 16.075,2.314 17.262,2.314 13.7,2.325 26.95,2.575 28.137,2.564 29.325,2.564 30.512,2.564 14.887,3.314 16.075,3.314 17.262,3.314 13.7,3.325 28.137,3.564 29.325,3.564 30.512,3.564 26.95,3.575 13.7,4.325 14.887,4.314 16.075,4.314 17.262,4.314 26.95,4.575 28.137,4.564 29.325,4.564 30.512,4.564 14.887,5.314 16.075,5.314 17.262,5.314 13.7,5.325 26.95,5.575 28.137,5.564 29.325,5.564 30.512,5.564 16.989,15.438 17.989,15.438 18.989,15.438 17,16.625 18,16.625 19,16.625 34.989,16.814 35.989,16.814 36.989,16.814 37.989,16.814 17,17.813 18,17.813 19,17.813 33.989,18.001 34.989,18.001 35.989,18.001 36.989,18.001 37.989,18.001 17,19 17,19 18,19 18,19 19,19 19,19 33.989,19.188 34.989,19.188 35.989,19.188 36.989,19.188 37.989,19.188 17,20.187 18,20.187 19,20.187 33.989,20.375 34,20.375 34.989,20.375 35,20.375 35.989,20.375 36,20.375 37,20.375 38,20.375 25.678,20.581 28.053,20.581 24.491,20.592 17,21.375 18,21.375 19,21.375 34,21.563 34,21.563 35,21.563 35,21.563 24.491,21.592 25.678,21.581 26.866,21.581 28.053,21.581 17.011,22.562 18.011,22.562 19.011,22.562 24.491,22.592 25.678,22.581 26.866,22.581 28.053,22.581 34,22.75 17,23.5 18,23.5 19,23.5 20,23.5 25.678,23.581 26.866,23.581 28.053,23.581 24.491,23.592 30.989,23.688 31.989,23.688 31.989,23.688 32.989,23.688 32.989,23.688 33.989,23.688 17,24.687 18,24.687 19,24.687 20,24.687 31,24.875 32,24.875 32,24.875 33,24.875 33,24.875 34,24.875 17,25.875 18,25.875 19,25.875 20,25.875 31,26.063 32,26.063 32,26.063 33,26.063 33,26.063 34,26.063 17.011,27.062 18.011,27.062 19.011,27.062 31,27.25 32,27.25 32,27.25 33,27.25 33,27.25 34,27.25
NetC3_2: C3.2 U1.6 | length 5.1
  Top Layer w0.254: U1.6 27.495,17.755 28,17.25 28.972,17.25 29.7,16.522 C3.2
NetC4_1: C4.1 CC.3 L1.2 L2.2 Q1.1 Q1.2 Q1.3 Q2.5 R4.2 U1.10 | length 28.7
  Top Layer w0.254: CC.3 18.238,46.747 18.238,40.618 Q2.5@18.315,40.54 ; Q1.1 Q1.1@26.894,40.075 ; U1.10 26.86,25.966 27.25,26.355 C4.1 v1(28.75,27.75)
  Bottom Layer w0.254: v1(14.689,29.013) 19.955,29.013 23.46,25.508 27.758,25.508 28.75,26.5 v1(28.75,27.75) ; v1(26.7,39.575) 27.376,39.575
  other v1: 12.689,29.013 13.689,29.013 12.689,30.2 13.689,30.2 14.689,30.2 12.689,31.388 13.689,31.388 14.689,31.388 12.7,32.575 13.7,32.575 14.7,32.575 16.82,37.075 17.852,37.075 18.885,37.075 19.917,37.075 20.95,37.075 16.82,38.075 17.852,38.075 18.885,38.075 19.917,38.075 20.95,38.075 12.45,38.575 13.45,38.575 14.45,38.575 16.82,39.075 17.852,39.075 18.885,39.075 19.917,39.075 20.95,39.075 24.7,39.575 25.7,39.575 12.45,39.762 13.45,39.762 14.45,39.762 16.82,40.075 17.852,40.075 18.885,40.075 19.917,40.075 20.95,40.075 24.7,40.762 25.7,40.762 26.7,40.762 12.45,40.95 13.45,40.95 14.45,40.95 17.764,41.836 18.951,41.836 20.138,41.836 20.138,41.836 21.325,41.825 22.513,41.825 23.7,41.825 24.7,41.825 25.7,41.825 13.015,41.858 14.202,41.847 15.389,41.847 16.576,41.847 16.576,41.847 17.764,42.836 18.951,42.836 20.138,42.836 20.138,42.836 21.325,42.825 22.513,42.825 23.7,42.825 13.015,42.858 14.202,42.847 15.389,42.847 16.576,42.847 16.576,42.847 21.325,43.825 22.513,43.825 23.7,43.825 14.202,43.847 15.389,43.847 16.576,43.847 16.576,43.847 17.764,43.836 18.951,43.836 20.138,43.836 20.138,43.836
NetC4_2: C4.2 U1.12 | length 3
  Top Layer w0.254: C4.2 25.25,26.348 25.54,26.059 U1.12
NetC5_2: C5.2 U1.1 | length 2.6
  Top Layer w0.254: C5.2 23,20 23.77,19.23 U1.1
NetC6_1: C6.1 CV.2 R5.1 R6.2 U1.4 | length 27.6
  Top Layer w0.254: C6.1 26.125,15.575 26.2,15.5 ; U1.4 26.2,15.5 ; R5.1 R6.2 35.95,8.7 38.25,11 38.25,12.25 37.75,12.75 35.125,12.75 CV.2 32.775,12.75 28,12.75 26.2,14.55 26.2,15.5
NetLED1_C: IN.C R2.2 | length 3.9
  Top Layer w0.254: R2.2 37.27,32.48 IN.C
NetLED2_C: OUT.C R3.2 | length 2.8
  Top Layer w0.254: R3.2 OUT.C@11.45,8.214
NetQ1_4: Q1.4 U1.11 | length 18
  Top Layer w0.254: v1(21.94,40.036) Q1.4 ; U1.11 26.223,24.943 26.223,26.357 v1(26.247,26.38)
  Bottom Layer w0.254: v1(21.94,40.036) 21.94,30.686 v1(26.247,26.38)
NetQ2_4: Q2.4 U1.13 | length 11.8
  Top Layer w0.254: v1(20.851,33.077) 20.853,33.079 20.853,34.612 Q2.4 ; v1(23.5,26.5) 23.524,26.476 24.181,26.476 24.854,25.803 24.854,24.971 U1.13
  Bottom Layer w0.254: v1(20.851,33.077) 20.851,29.149 v1(23.5,26.5)
NetR1_1: R1.1 U1.7 | length 4.2
  Top Layer w0.254: U1.7 30.163,19.23 30.933,20 R1.1
NetR4_1: CC.2 R4.1 U1.8 | length 74.9
  Top Layer w0.254: CC.2 20.7,45.575 20.95,45.325 26.2,45.325 27.135,44.39 R4.1@27.135,42.825 ; R4.1 R4.1@27.275,42.75 ; U1.8 28.156,25.906 28.434,26.184 29.434,26.184 v1(29.5,26.25)
  Bottom Layer w0.254: CC.2 20.7,45.7 20,45 13.25,45 11,42.75 11,20.75 11.75,20 15.5,20 16,20.5 16,28 16.25,28.25 20,28.25 23.25,25 28.25,25 v1(29.5,26.25)
Vin: C1.2 C2.2 IN.A j1.2 Q1.5 R1.2 U1.2 | length 32.1
  Top Layer w0.254: v1(24.5,17.25) 24.905,17.655 U1.2 ; v1(30.25,17.25) 30.25,17.344 30.57,17.664 30.57,17.82 30.75,18 R1.2
  Bottom Layer w0.254: v1(24.5,17.25) v1(30.25,17.25) 30.25,29 ; v1(30.25,34.75) 30.25,29 ; IN.A 30.25,29
  other v1: 23.2,34.825 24.138,34.825 25.075,34.825 26.013,34.825 26.95,34.825 23.2,35.575 24.138,35.575 25.075,35.575 26.013,35.575 26.95,35.575 23.2,36.325 24.138,36.325 25.075,36.325 26.013,36.325 26.95,36.325 23.2,37.075 24.138,37.075 25.075,37.075 26.013,37.075 26.95,37.075 23.2,37.825 24.138,37.825 25.075,37.825 26.013,37.825 26.95,37.825 28.95,45.825 29.95,45.825 30.95,45.825 31.95,45.825 28.95,47.012 29.95,47.012 30.95,47.012 31.95,47.012 28.95,48.2 29.95,48.2 30.95,48.2 31.95,48.2 28.961,49.387 29.961,49.387 30.961,49.387 31.961,49.387
Vout: C6.2 C7.P CV.3 j2.1 L1.1 L2.1 OUT.A R5.2 | length 22.6
  Top Layer w0.3: C6.2@22.85,15.72 C7.P 31.95,9.675 ; R5.2 31.95,9.675 ; CV.3 34.59,9.675 31.95,9.675
pads on no net: CC.1 U1.3
copper on no net:
  other v2: 35.2,4.075 3.95,46.075

## Polygon pours and split planes (outlines as drawn)
NetC4_1 on Top Layer "NETC4_1_L01_P013" (solid, pour order 13): 15.5,36.25 15.5,20.75 15.25,20.5 12,20.5 11.75,20.75 11.75,42.25 13.75,44.25 25.5,44.25 27.8,41.95 27.8,38.675 21.8,38.675 21.8,36.25
Vin on Top Layer "VIN_L01_P020" (solid, pour order 20): 22.25,38.253 28.771,38.253 28.771,50.003 40.021,50.003 40.021,44.021 40.003,44.003 33,44.003 33,33.503 22.25,33.503
GND on Top Layer "GND_L01_P028" (solid, pour order 28): 40,43.75 33.271,43.75 33.271,27.675 16.25,27.675 16.25,16 13.962,13.712 0,13.712 0,0 40,0
GND on Top Layer "GND_L01_P029" (solid, pour order 29): 20.25,35.75 20.25,32.5 33.5,32.5 33.5,29.25 16.25,29.25 16.25,35.75
Vout on Top Layer "VOUT_L01_P025" (solid, pour order 25): 0,50 9,50 9,16 11,14 25,14 26,13 26,9 25,8 0,8
GND on Top Layer "GND_L01_P027" (solid, pour order 27): 32.95,33.325 32.575,33.7 32.7,33.575
GND on Bottom Layer "GND_L02_P022" (solid, pour order 22): 0,50 40,50 40,0 0,0
NetC4_1 on Bottom Layer "NETC4_1_L02_P019" (solid, pour order 19): 15.45,36.325 15.45,20.825 15.2,20.575 11.95,20.575 11.7,20.825 11.7,42.325 13.7,44.325 25.45,44.325 27.75,42.025 27.75,38.75 21.75,38.75 21.75,36.325